# EAGLE board untitled (EAGLE 8.7.0)

Size 160 x 100 mm. Coordinates in mm from the lower left corner, seen from the top.
Outline: 0,0 160,0 160,100 0,100 0,0
Copper layers (1*16): Top 0.035mm / dielectric 1.5mm / Bottom 0.035mm
Design rules "default": minimum track width 6mil, minimum drill 0.35mm, track to track 6mil, track to pad 6mil, pad to pad 6mil, via to via 6mil, smd to smd 6mil, copper to edge 40mil, drill to drill 6mil, minimum pad ring 10mil, minimum via ring 8mil, stop-mask expansion 4mil, vias tented up to drill 0mil, thermal gap 10mil

## Footprints (pad centres in the part's own frame; a part is rotated, then mirrored left to right if it is on the bottom)
_0805 = smd 1.2 x 1.3: 1 -1.016,0; 2 1.016,0
EVERLIGHT_45-21 = smd 1.4 x 1.4: A -1.45,0; K 1.45,0
SOT23-3 = smd 0.8 x 0.9: 1 -0.95,-1; 2 0.95,-1; 3 0,1.1
SOT23-WIDE = smd 1 x 1.2: 1 -0.95,-1; 2 0.95,-1; 3 0,1
0603-NO = smd 1.075 x 1: 1 -0.85,0; 2 0.85,0
_0603MP = smd 0.8 x 0.8: 1 -0.762,0; 2 0.762,0
SEWINGTAP_0.5 = drill 1.2 pad 2.184: TAP 0,0
TCS3472_FN6 = smd 1.2 x 0.4: P$1 -0.85,0.65 | smd 1 x 0.4: P$2 -0.95,0; P$3 -0.95,-0.65; P$4 0.95,-0.65; P$5 0.95,0; P$6 0.95,0.65
LIGHT-SENSOR-BH1750 = drill 1 square: 1 -7.62,-5.08 | drill 1: 2 -7.62,-2.54; 3 -7.62,0; 4 -7.62,2.54; 5 -7.62,5.08 | hole 3: 6.35,4.445; 6.35,-4.445
ESP-12S = smd 1.7 x 1.1: 1 -7.65,5.77; 2 -7.65,3.77; 3 -7.65,1.77; 4 -7.65,-0.23; 5 -7.65,-2.23; 6 -7.65,-4.23; 7 -7.65,-6.23; 8 -7.65,-8.23; 9 7.65,-8.23; 10 7.65,-6.23; 11 7.65,-4.23; 12 7.65,-2.23; 13 7.65,-0.23; 14 7.65,1.77; 15 7.65,3.77; 16 7.65,5.77 | smd 3.2 x 3.2: P$1 0.2,1.1

## Placement (x,y rotation side)
C4  0.1µF  [_0805]  -38.1,2.54 0 top  (outside the outline)
LED1  45-21/LK2C-B38452C4CB2/2T  [EVERLIGHT_45-21]  -35.56,27.94 0 top  (outside the outline)
Q1  mmbt2222  [SOT23-3]  -15.24,33.02 0 top  (outside the outline)
Q2  mmbt2222  [SOT23-3]  -19.05,33.02 0 top  (outside the outline)
Q3  BSS138  [SOT23-WIDE]  -25.4,33.02 0 top  (outside the outline)
R1  10K  [_0805]  -15.24,27.94 0 top  (outside the outline)
R2  10K  [_0805]  -20.32,27.94 0 top  (outside the outline)
R3  10K  [0603-NO]  -31.75,36.83 0 top  (outside the outline)
R4  4.7K  [0603-NO]  -36.83,36.83 0 top  (outside the outline)
R5  10K  [0603-NO]  -16.51,39.37 0 top  (outside the outline)
R6  10K  [_0805]  -25.4,27.94 0 top  (outside the outline)
R7  10K  [0603-NO]  -21.59,39.37 0 top  (outside the outline)
R9  10K  [0603-NO]  -26.67,39.37 0 top  (outside the outline)
R11  1K  [_0603MP]  -29.21,33.02 0 top  (outside the outline)
TP1  SEWTAP0.5IN  [SEWINGTAP_0.5]  -33.02,31.75 0 top  (outside the outline)
TP2  SEWTAP0.5IN  [SEWINGTAP_0.5]  -36.83,31.75 0 top  (outside the outline)
TP3  SEWTAP0.5IN  [SEWINGTAP_0.5]  -15.24,36.83 0 top  (outside the outline)
TP4  SEWTAP0.5IN  [SEWINGTAP_0.5]  -19.05,36.83 0 top  (outside the outline)
TP5  SEWTAP0.5IN  [SEWINGTAP_0.5]  -22.86,36.83 0 top  (outside the outline)
TP6  SEWTAP0.5IN  [SEWINGTAP_0.5]  -26.67,36.83 0 top  (outside the outline)
U1  TCS34725  [TCS3472_FN6]  -33.02,2.54 0 top  (outside the outline)
U$7  LIGHT-SENSOR-BH1750  [LIGHT-SENSOR-BH1750]  -58.42,12.7 0 top  (outside the outline)
X2  ESP-12  [ESP-12S]  -21.59,10.16 0 top  (outside the outline)

## Library data of the parts
C4 LED1 Q3 R1-R7 R9 R11 U1 X2 = microbuilder
Q1 Q2 = SparkFun
TP1-TP6 = adafruit
U$7 = diy-modules

## Nets
3.3V: R3.2 R9.2 X2.2 X2.8
+3V3: C4.1 LED1.A R1.2 R2.2 R6.2 TP1.TAP U1.P$1 U$7.1
CH_PD: R3.1 X2.3
DTR: Q2.2 R5.1
GND: C4.2 Q3.2 R4.1 TP2.TAP U1.P$3 U$7.2 X2.9 X2.P$1
GPIO0: Q2.3 X2.12
GPIO2: R9.1 X2.11
GPIO4/SDA: X2.13
GPIO5/SCL: X2.14
GPIO12/MISO: X2.6
GPIO13/MOSI: X2.7
GPIO14/SCK: X2.5
GPIO15: R4.2 X2.10
GPIO16: X2.4
INT: Q3.1 R6.1 U1.P$5
N$1: LED1.K Q3.3
N$12: Q1.1 R5.2
N$13: Q2.1 R7.2
RESET: Q1.3 X2.1
RTS: Q1.2 R7.1
RXD: R11.2 X2.15
SCL_3V: R1.1 TP5.TAP TP6.TAP U1.P$2
SDA_3V: R2.1 TP3.TAP TP4.TAP U1.P$6
TXD: X2.16
USB_RX: R11.1

## Tracks (layer width: path | path; a pad name or v marks a point on that pad's centre or on a via)
3.3V  (3 unrouted)
+3V3  (7 unrouted)
CH_PD  (1 unrouted)
DTR  (1 unrouted)
GND  (7 unrouted)
GPIO0  (1 unrouted)
GPIO2  (1 unrouted)
GPIO15  (1 unrouted)
INT  (2 unrouted)
N$1  (1 unrouted)
N$12  (1 unrouted)
N$13  (1 unrouted)
RESET  (1 unrouted)
RTS  (1 unrouted)
RXD  (1 unrouted)
SCL_3V  (3 unrouted)
SDA_3V  (3 unrouted)